# EAGLE board stm32f103XX (EAGLE 7.2.0)
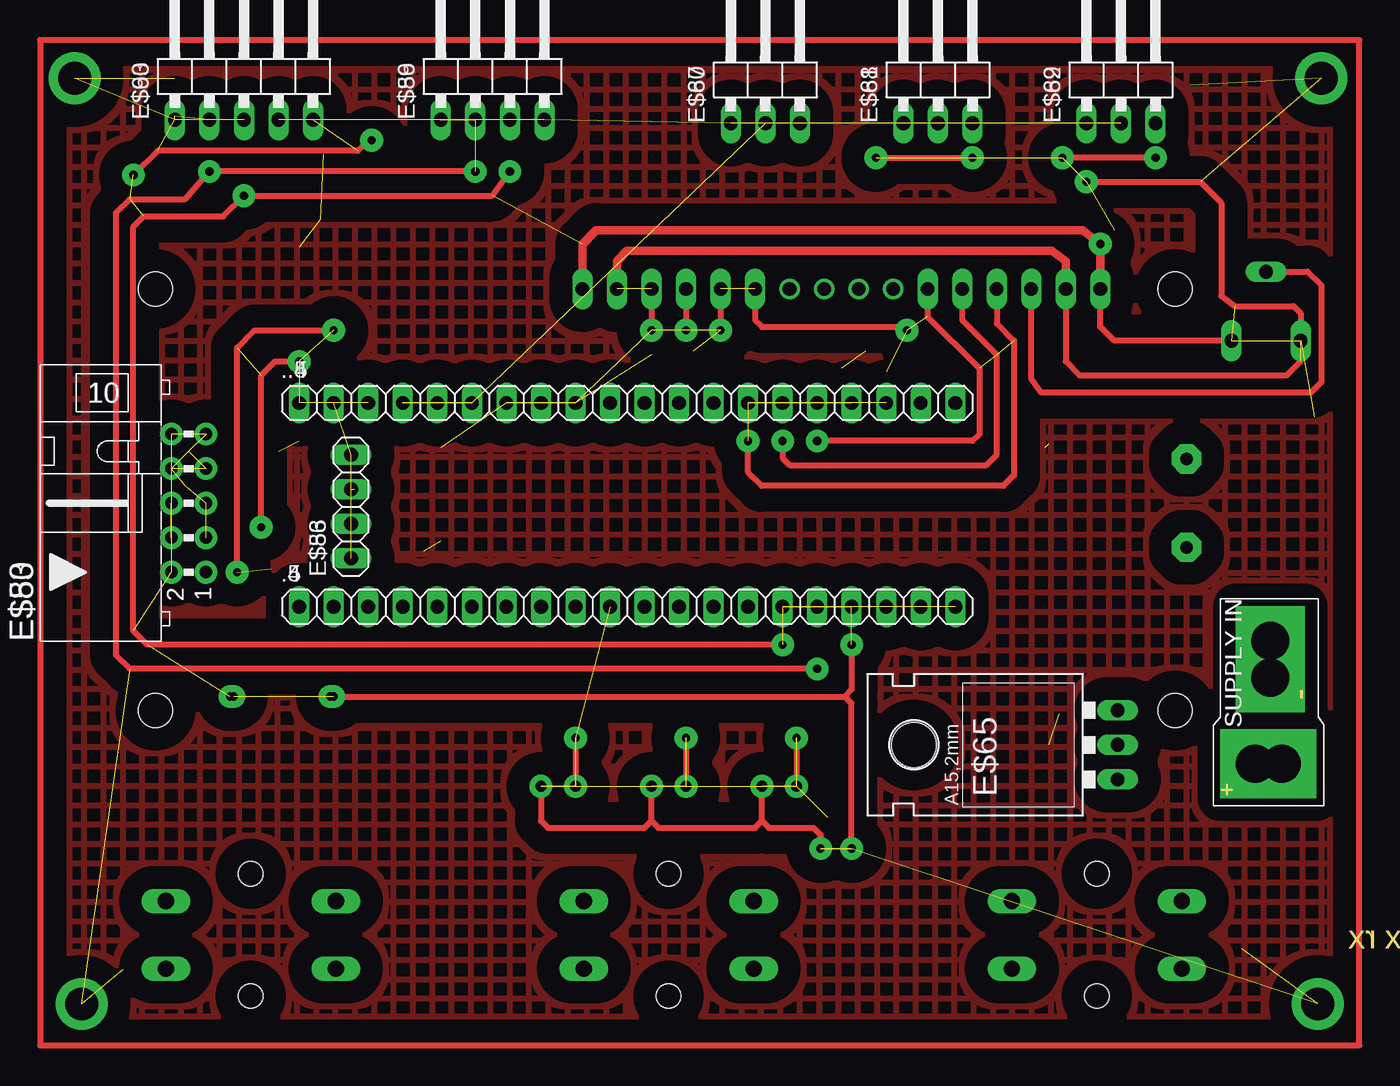
[diagram p0: board, top side]
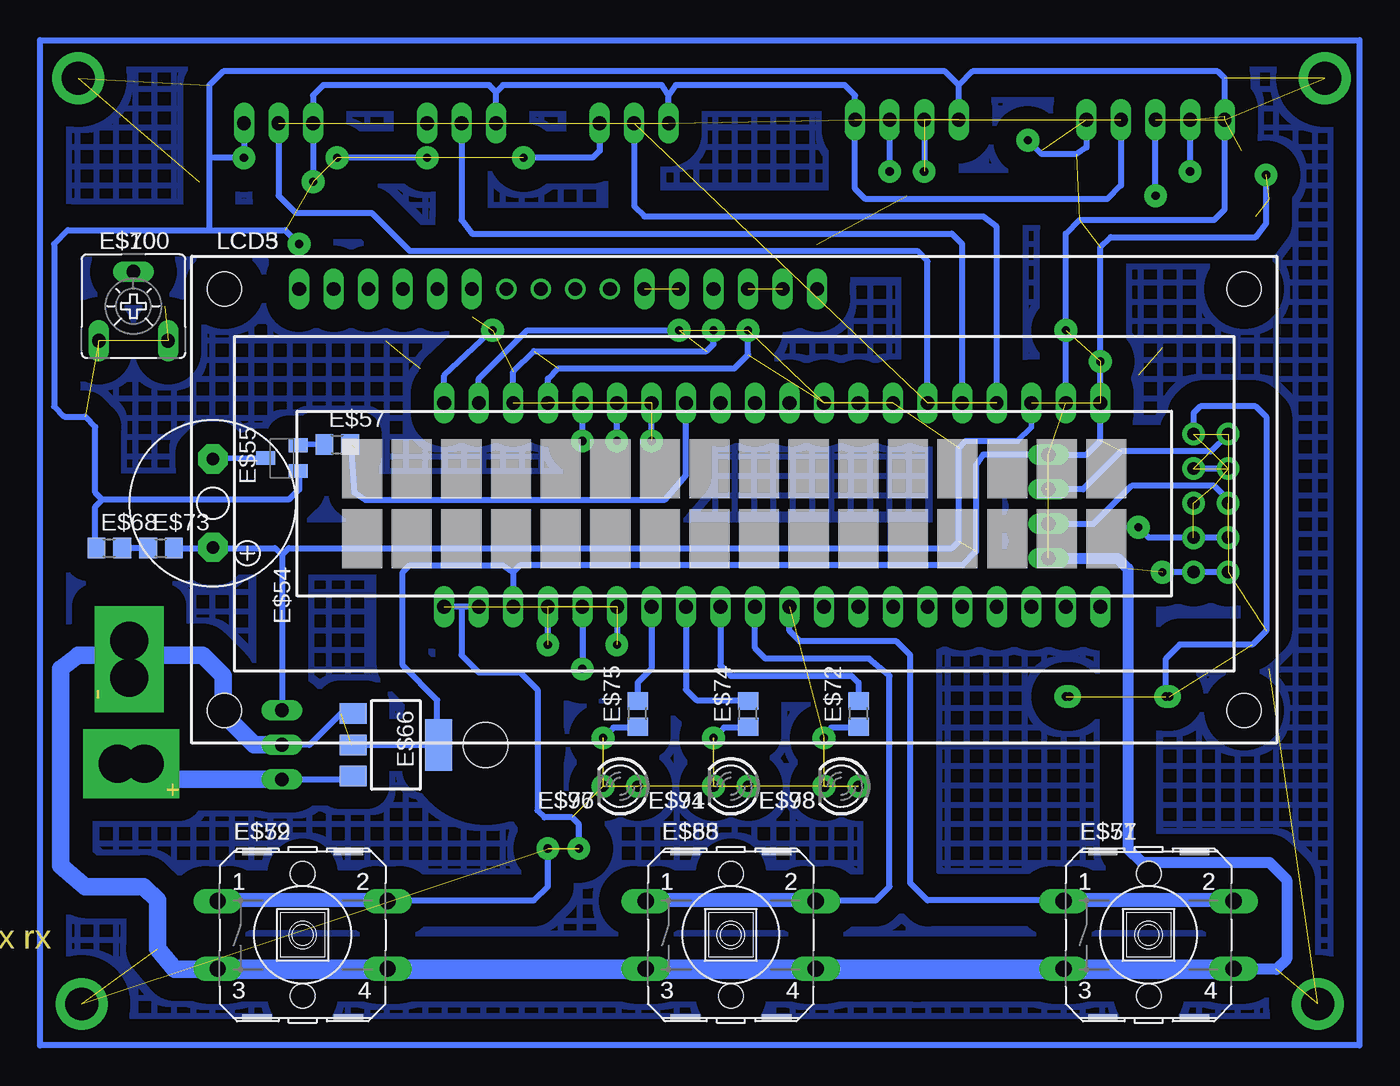
[diagram p1: board, bottom side, seen from below]

No outline drawn. Coordinates in mm, seen from the top.
Copper layers (1*16): Top 0.035mm / dielectric 1.5mm / Bottom 0.035mm
Design rules "default": minimum track width 10mil, minimum drill 24mil, track to track 8mil, track to pad 8mil, pad to pad 8mil, via to via 8mil, smd to smd 8mil, copper to edge 40mil, drill to drill 8mil, minimum pad ring 10mil, minimum via ring 8mil, stop-mask expansion 4mil, vias tented up to drill 0mil, thermal gap 10mil

## Footprints (pad centres in the part's own frame; a part is rotated, then mirrored left to right if it is on the bottom)
1X20 = drill 1.016 long: 1 -24.13,0; 2 -21.59,0; 3 -19.05,0; 4 -16.51,0; 5 -13.97,0; 6 -11.43,0; 7 -8.89,0; 8 -6.35,0; 9 -3.81,0; 10 -1.27,0; 11 1.27,0; 12 3.81,0; 13 6.35,0; 14 8.89,0; 15 11.43,0; 16 13.97,0; 17 16.51,0; 18 19.05,0; 19 21.59,0; 20 24.13,0
B3F-40XX = drill 1.194 long: 1 -6.248,2.489; 2 6.248,2.489; 3 -6.248,-2.489; 4 6.248,-2.489 | hole 1.803: 0,-4.496; 0,4.496
ML10L = drill 0.914 octagon: 1 -5.08,-1.27; 2 -5.08,1.27; 3 -2.54,-1.27; 4 -2.54,1.27; 5 0,-1.27; 6 0,1.27; 7 2.54,-1.27; 8 2.54,1.27; 9 5.08,-1.27; 10 5.08,1.27
F/QMX = drill 0.914 pad 2.159 octagon: + 3.251,0; - -3.251,0
SC59-EBC = smd 1 x 1.4: B 0.95,-1.2; C 0,1.2; E -0.95,-1.2
1X04 = drill 1.016 long: 1 -3.81,0; 2 -1.27,0; 3 1.27,0; 4 3.81,0
R0805 = smd 1.3 x 1.5: 1 -0.95,0; 2 0.95,0
1X04/90 = drill 1.016 long: 1 -3.81,-3.81; 2 -1.27,-3.81; 3 1.27,-3.81; 4 3.81,-3.81
1X03/90 = drill 1.016 long: 1 -2.54,-3.81; 2 0,-3.81; 3 2.54,-3.81
1X05/90 = drill 1.016 long: 1 -5.08,-3.81; 2 -2.54,-3.81; 3 0,-3.81; 4 2.54,-3.81; 5 5.08,-3.81
78XXL = drill 1.016 long: GND 0,-3.81; IN -2.54,-3.81; OUT 2.54,-3.81 | hole 3.302: 0,11.176
SOT223 = smd 1.5 x 2: 1 -2.3,-3.15; 2 0,-3.15; 3 2.3,-3.15 | smd 3.8 x 2: 4 0,3.15
SUP = drill 2.8 pad 5.08 square: + -3.658,-1.473; +1 -3.658,-3.454; - 2.642,-2.591; -1 5.359,-2.591
CA6V = drill 1.016 long: A -2.54,-2.54; E 2.54,-2.54; S 0,2.54
LED3MM = drill 0.813 octagon: A -1.27,0; K 1.27,0
TUXGR_16X2_R2 = drill 1 pad 1.27 long: 1 -32.01,15.498; 2 -29.47,15.498; 3 -26.93,15.498; 4 -24.39,15.498; 5 -21.85,15.498; 6 -19.31,15.498; 12 -4.07,15.498; 13 -1.53,15.498; 14 1.01,15.498; 15 3.55,15.498; 16 6.09,15.498 | drill 1 pad 0.254: 7 -16.76,15.5; 8 -14.22,15.5; 9 -11.68,15.5; 10 -9.14,15.5; 17 -11.69,15.498 | drill 1 pad 1.422 long: 11 -6.61,15.498 | hole 2.5: -37.5,-15.5; 37.5,-15.5; -37.5,15.5; 37.5,15.5

## Placement (x,y rotation side)
.4  [1X20]  129.54,108.46 0 top
.5  [1X20]  129.54,108.46 0 top
..4  [1X20]  129.54,123.44 0 top
..5  [1X20]  129.54,123.44 0 top
E$51  [B3F-40XX]  101.85,84.33 0 bottom
E$52  [B3F-40XX]  164.08,84.33 0 bottom
E$53  [ML10L]  97.28,116.08 90 top
E$54  [F/QMX]  170.69,116.08 270 bottom
E$55  [SC59-EBC]  165.61,119.38 90 bottom
E$56  [1X04]  109.22,115.82 90 top
E$57  [R0805]  161.54,120.4 0 bottom
E$58  [B3F-40XX]  132.59,84.33 0 bottom
E$59  [1X04/90]  119.63,148.08 0 top
E$60  [1X03/90]  139.7,147.83 0 top
E$61  [1X03/90]  152.4,147.83 0 top
E$62  [1X03/90]  165.86,147.83 0 top
E$63  [1X05/90]  101.35,148.08 0 top
E$65  [78XXL]  161.8,98.3 90 top
E$66  [SOT223]  157.23,98.3 270 bottom
E$68  [R0805]  178.31,112.78 0 bottom
E$69  [SUP]  174.24,100.58 90 top
E$70  [CA6V]  176.53,130.56 0 bottom
E$71  [LED3MM]  132.59,95.25 180 bottom
E$72  [R0805]  123.19,100.58 90 bottom
E$73  [R0805]  174.5,112.78 0 bottom
E$74  [R0805]  131.32,100.58 90 bottom
E$75  [R0805]  139.45,100.58 90 bottom
E$76  [LED3MM]  140.72,95.25 180 bottom
E$77  [B3F-40XX]  101.85,84.33 0 bottom
E$78  [LED3MM]  124.46,95.25 180 bottom
E$79  [B3F-40XX]  164.08,84.33 0 bottom
E$80  [ML10L]  97.28,116.08 90 top
E$83  [1X04]  109.22,115.82 90 top
E$85  [B3F-40XX]  132.59,84.33 0 bottom
E$86  [1X04/90]  119.63,148.08 0 top
E$87  [1X03/90]  139.7,147.83 0 top
E$88  [1X03/90]  152.4,147.83 0 top
E$89  [1X03/90]  165.86,147.83 0 top
E$90  [1X05/90]  101.35,148.08 0 top
E$94  [LED3MM]  132.59,95.25 180 bottom
E$97  [LED3MM]  140.72,95.25 180 bottom
E$98  [LED3MM]  124.46,95.25 180 bottom
E$100  [CA6V]  176.53,130.56 0 bottom
E$102  [SUP]  174.24,100.58 90 top
LCD3  [TUXGR_16X2_R2]  132.33,116.33 0 bottom
LCD5  [TUXGR_16X2_R2]  132.33,116.33 0 bottom

## Library data of the parts
.4 .5 ..4 ..5 E$56 E$59-E$63 E$83 E$86-E$90 = pinhead
E$51 E$52 E$58 E$77 E$79 E$85 = switch-omron
E$53 E$80 = con-ml
E$54 = buzzer
E$55 = transistor
E$57 E$68 E$72-E$75 = resistor
E$65 E$66 = v-reg
E$69 E$102 = SUP
E$70 E$100 = pot
E$71 E$76 E$78 E$94 E$97 E$98 = led
LCD3 LCD5 = display-lcd

## Nets
S$4: ..5.1 ..5.2 ..5.3 E$83.1 E$83.2 E$83.3 E$83.4
S$6: E$80.3 E$80.5
S$7: .4.10
S$43: .4.15 .4.16 .4.17 .4.18 .4.19 .4.20 ..4.1 ..4.2 ..4.3 ..4.7 ..4.8 ..4.9 ..4.14 ..4.15 ..4.16 ..4.17 ..4.18 E$53.2 E$53.3 E$53.4 E$53.5 E$53.6 E$53.9 E$53.10 E$56.1 E$56.2 E$56.3 E$56.4 E$59.1 E$59.2 E$59.3 E$63.1 E$63.2 E$63.3 E$63.5 E$65.GND E$65.OUT E$70.A E$70.E E$71.A E$76.A E$78.A
S$90: .4.11
S$124: .4.13
S$125: ..4.13
S$126: ..4.10
S$127: E$62.3
S$131: .4.12
S$133: .4.9
S$139: ..4.20
S$140: ..4.19
S$141: E$70.S
S$142: .5.11
S$146: ..4.4 ..4.5 ..4.6 E$60.2 E$61.2 E$62.2
S$147: E$53.7 E$53.8
S$148: ..5.10
S$149: .5.12
S$150: .5.9
S$152: E$60.3
S$154: ..5.4 ..5.5 ..5.6 E$87.2 E$88.2 E$89.2
S$156: E$87.3
S$157: E$78.K
S$158: E$71.K
S$159: E$76.K
S$160: E$65.IN
S$161: E$59.4 E$60.1 E$61.1 E$62.1 E$63.4
S$162: E$98.K
S$164: E$94.K
S$165: E$97.K
S$166: ..5.20
S$167: ..5.19
S$168: E$100.S
S$170: .5.13
S$171: ..5.13
S$174: E$86.4 E$87.1 E$88.1 E$89.1 E$90.4
S$175: E$89.3
S$179: .5.10 .5.15 .5.16 .5.17 .5.18 .5.19 .5.20 ..5.7 ..5.8 ..5.9 ..5.14 ..5.15 ..5.16 ..5.17 ..5.18 E$80.2 E$80.4 E$80.6 E$80.9 E$80.10 E$86.1 E$86.2 E$86.3 E$90.1 E$90.2 E$90.3 E$90.5 E$94.A E$97.A E$98.A E$100.A E$100.E

## Tracks (layer width: path | path; a pad name or v marks a point on that pad's centre or on a via)
S$2
  pour Top (isolate 1.676, hatched): 183.39,76.2 86.36,76.2 86.36,150.11 183.39,150.11
S$3
  pour Bottom (isolate 1.676, hatched): 86.36,76.2 183.39,76.2 183.39,150.11 86.36,150.11
S$4  (via drill 0.6 pad 1.68)  (8 unrouted)
  Top 0.457: v107.95,128.78 102.11,128.78 100.84,127.51 v100.84,111 | v102.62,114.3 102.62,125.48 103.63,126.49 v105.41,126.49
S$5  (via drill 0.6 pad 1.68)
  other vias: 98.55,111
S$6  (via drill 0.6 pad 1.68)  (1 unrouted)
  other vias: 98.55,116.08 98.55,116.08 98.55,113.54
S$7
  Bottom 0.457: .4.10 128.27,106.68 127.51,105.92 120.4,105.92 119.38,104.9 119.38,88.14 118.11,86.87 108.2,86.87
  Bottom 1.016: 95.76,86.87 108.2,86.87
S$43  (via drill 0.6 pad 1.68, 2.41 pad 3.81)  (54 unrouted)
  Bottom 0.406: 111.51,120.65 110.49,121.67 ..4.3
  Bottom 0.457: ..4.18 148.59,125.73 147.07,127.25 134.37,127.25 133.86,127.76 v133.86,128.78 | ..4.17 146.05,125.22 145.29,125.98 132.33,125.98 131.32,127 v131.32,128.78 | v140.97,120.65 ..4.15 | v143.51,120.65 ..4.16 | 157.99,86.87 147.07,86.87 146.05,87.88 v146.05,90.68 | .4.19 152.4,108.46 | 152.4,108.46 .4.20 | 111.51,120.65 115.32,120.65 115.82,120.14 115.82,113.28 116.33,112.78 165.1,112.78 165.61,112.27 | 160.53,98.3 154.18,98.3 | 154.18,98.3 153.92,98.3 | 154.18,98.3 154.18,101.6 156.72,104.14 156.72,111 156.21,111.51 149.35,111.51 148.59,111 | v93.22,140.21 93.22,136.65 93.98,135.64 104.65,135.64 105.41,134.87 ..4.1 105.41,120.65 106.43,119.63 E$56.4 114.05,119.63 114.55,118.87 114.55,112.52 115.57,111.51 148.08,111.51 148.59,111 | 148.59,111 .4.18 | 152.4,108.46 152.4,104.9 151.13,103.63 148.08,103.63 146.81,102.36 146.81,93.47 146.3,92.96 144.27,92.96 143.76,92.46 v143.76,90.68 | ..4.2 107.95,135.89 106.93,136.91 97.03,136.91 96.27,137.67 96.27,144.53 | E$56.2 105.92,114.55 103.12,117.35 97.03,117.35 96.01,116.33 E$53.6 | E$63.5 106.43,142.24 107.19,141.73 109.73,141.73 v110.74,142.75 | E$63.1 96.27,147.32 96.77,147.83 114.81,147.83 115.82,146.81 | E$59.1 115.82,146.81 | 115.82,146.81 116.84,147.83 169.93,147.83 170.94,146.81 170.94,141.48 | v154.94,141.48 v161.54,141.48 | .4.15 v140.97,105.66 | .4.16 v143.51,103.89 | E$59.3 v120.9,140.46 | E$59.2 v118.36,140.46 | v146.05,105.66 .4.17 | v101.35,138.68 E$63.3 | v98.81,140.46 E$63.2 | 161.29,100.58 163.58,98.3 E$65.GND | 170.94,136.14 181.36,136.14 182.37,135.13 182.37,123.19 181.61,122.43 180.09,122.43 179.32,121.67 179.32,116.84 178.82,116.33
  Bottom 0.457: 170.94,136.14 165.35,136.14 v164.34,135.13 | 170.94,141.48 170.94,136.14 | 164.34,117.86 164.34,117.09 165.1,116.33 178.82,116.33 | v168.4,141.48 170.94,141.48 | 119.13,82.04 118.87,81.79 | E$53.2 v98.55,111 v100.84,111 | E$53.4 E$53.3 101.85,113.54 v102.62,114.3 | 109.47,117.09 106.68,117.09 103.89,119.89 97.28,119.89 E$53.10 | 170.69,112.78 166.12,112.78 165.61,112.27 | 179.32,112.78 179.32,115.82 178.82,116.33 | E$53.9 98.55,122.68 98.04,123.19 93.98,123.19 93.22,122.43 93.22,106.68 94.23,105.66 99.57,105.66 100.58,104.65 v100.58,101.85 | 165.61,112.27 E$65.OUT | v138.43,120.65 ..4.14
  Bottom 0.813: E$56.1 104.14,112.01 103.38,111.25 103.38,90.68 102.36,89.66 92.96,89.66 91.69,88.39 91.69,82.55 92.46,81.79 95.76,81.79
  Bottom 1.016: 157.99,86.87 170.18,86.87
  Bottom 1.27: E$65.GND 167.64,98.3 169.93,100.58 169.93,103.38 171.45,104.9 180.59,104.9 181.86,103.89 181.86,89.41 180.09,87.88 175.77,87.88 174.75,86.87 174.75,83.31 173.48,81.79 170.43,81.79
  Bottom 1.422: 95.76,81.79 118.87,81.79 170.43,81.79
  other vias: 107.95,101.85 147.83,141.48 163.32,139.7 123.19,95.25 125.73,95.25 133.86,95.25 139.45,95.25 141.99,95.25 96.01,111 105.41,126.49 107.95,128.78 96.01,113.54 98.55,113.54 98.55,116.08 96.01,116.08 96.01,116.08 96.01,118.62 98.55,116.08 98.55,118.62 98.55,121.16 96.01,121.16 125.73,95.25 125.73,98.81 133.86,98.81 141.99,98.81 136.4,128.78 150.11,128.78 89.41,79.25 88.9,147.32 180.59,147.32 180.34,79.25
S$75
  Bottom 0.457: 138.43,108.2 138.43,103.89 139.45,102.87 139.45,101.6 139.19,101.35
S$124
  Bottom 0.457: .4.13 135.89,102.36 135.13,101.6 131.32,101.6
S$125  (1 unrouted)
  Bottom 0.457: 160.78,119.89 160.27,120.14 | 160.53,120.4 160.27,116.84 159.51,116.33 137.41,116.33 135.89,118.11 ..4.13
S$127
  Bottom 0.457: E$62.3 168.4,141.48
S$128
  Bottom 0.457: 173.48,112.78 170.69,112.78
S$130
  Bottom 0.457: 86.36,76.2 183.39,76.2 183.39,150.11 86.36,150.11 86.36,76.2
S$131
  Bottom 0.457: .4.12 133.35,104.14 132.59,103.38 123.7,103.38 123.19,102.87 123.19,101.6
S$137
  Bottom 0.457: 126.49,86.87 121.92,86.87 120.9,87.88 120.9,103.38 122.43,104.65 130.05,104.65 130.81,105.41 130.81,108.71
  Bottom 1.016: 126.24,86.87 126.49,86.87 138.94,86.87
S$139
  Bottom 0.457: ..4.20 153.67,125.48 149.86,129.03
S$140
  Bottom 0.457: ..4.19 151.13,125.22 147.57,128.78 136.4,128.78
S$143
  Bottom 0.406: 166.62,119.38 170.69,119.38
S$144
  Bottom 0.406: 164.34,120.4 162.56,120.4
S$146  (2 unrouted)
  Bottom 0.457: E$60.2 139.7,137.92 138.94,137.16 114.05,137.16 113.03,136.4 ..4.4 | E$61.2 152.4,136.91 151.64,135.89 116.33,135.89 115.57,135.13 ..4.5 | E$62.2 165.86,138.68 164.59,137.41 159,137.41 156.21,134.62 118.87,134.62 118.11,133.86 ..4.6
S$147
  Bottom 0.457: E$53.8 E$53.7
S$152
  Bottom 0.457: E$60.3 142.24,141.99 142.75,141.48 147.83,141.48
S$154  (5 unrouted)
S$157  (1 unrouted)
  Bottom 0.457: 123.19,99.57 125.22,99.57 125.73,98.81
S$158  (1 unrouted)
  Bottom 0.457: 131.32,99.57 133.1,99.57 133.86,98.81
S$159  (1 unrouted)
  Bottom 0.457: 139.45,99.57 141.22,99.57 141.99,98.81
S$160
  Bottom 0.457: E$65.IN 160.53,95.76
  Bottom 1.27: E$65.IN 177.8,95.76
S$161
  Bottom 0.457: E$63.4 103.89,139.45 104.9,138.43 122.68,138.43 123.44,139.19 E$59.4 123.44,146.05 124.21,146.81 136.65,146.81 137.16,146.05 | E$60.1 137.16,146.05 | 137.16,146.05 137.67,146.81 149.35,146.81 149.86,146.3 | E$61.1 149.86,146.3 | 149.86,146.3 150.37,146.81 162.56,146.81 163.32,146.05 E$62.1 163.32,139.7
S$163
  Bottom 0.457: 175.51,112.78 177.55,112.78
S$168
  Top 0.457: E$100.S 179.58,133.1 180.59,132.08 180.59,124.97 179.83,124.21 160.02,124.21 159.26,125.22 159.26,131.83
S$174  (4 unrouted)
S$179  (via drill 0.6 pad 1.68, 2.41 pad 3.81)  (53 unrouted)
  Top 0.457: 138.94,131.83 138.94,129.54 139.45,129.03 149.86,129.03 v150.11,128.78 | 179.07,126.49 178.05,125.48 162.81,125.48 161.8,126.49 161.8,131.83 | 156.72,131.83 156.72,129.29 157.99,128.02 157.99,118.11 157.23,117.35 139.45,117.35 138.43,118.36 v138.43,120.65 | 151.64,131.83 151.64,129.79 155.45,125.98 155.45,121.16 154.94,120.65 v143.51,120.65 | v147.83,141.48 v154.94,141.48 | v140.97,105.66 94.23,105.66 93.22,106.68 93.22,136.4 93.98,137.16 99.82,137.16 v101.35,138.68 119.63,138.68 v120.9,140.46 | v143.51,103.89 92.96,103.89 91.95,104.9 91.95,137.41 92.96,138.43 97.03,138.43 v98.81,140.46 v118.36,140.46 | v146.05,90.68 146.05,101.35 145.54,101.85 | v110.74,142.75 110.49,142.75 109.73,141.99 95,141.99 v93.22,140.21 | v168.4,141.48 v161.54,141.48 | v107.7,101.85 145.54,101.85 | v146.05,105.66 146.05,102.36 145.54,101.85 | E$98.A 123.19,92.71 123.7,92.2 130.81,92.2 131.32,92.71 | 131.32,92.71 E$94.A | 131.32,92.71 131.83,92.2 138.94,92.2 139.45,92.71 | 139.45,92.71 E$97.A | v141.99,98.81 v141.99,95.25 | v133.86,98.81 v133.86,95.25 | v125.73,98.81 v125.73,95.25 | 139.45,92.71 139.95,92.2 143.26,92.2 143.76,91.69 v143.76,90.68 | v140.97,120.65 140.97,119.38 141.48,118.87 155.96,118.87 156.72,119.63 156.72,127 154.18,129.54 154.18,131.83 | 131.32,131.83 v131.32,128.78 | 133.86,131.83 v133.86,128.78 | 136.4,131.83 v136.4,128.78 | E$100.E 165.35,128.02 164.34,129.03 164.34,131.83 | v163.32,139.7 171.7,139.7 173.23,138.18 173.23,131.32 174.24,130.56 178.56,130.56 179.07,130.05 E$100.A
  Top 0.61: 126.24,131.83 126.24,135.13 127.25,136.14 163.07,136.14 v164.34,135.13 164.34,131.83 | 128.78,131.83 128.78,133.86 129.54,134.62 160.78,134.62 161.8,133.86 161.8,131.83
  other vias: 123.19,95.25 131.32,95.25 139.45,95.25 96.01,111 96.01,113.54 96.01,116.08 96.01,116.08 96.01,118.62 98.55,118.62 98.55,121.16 96.01,121.16 89.41,79.25 88.9,147.32 180.59,147.32 180.34,79.25 100.33,101.85
S$180
  Top 0.457: 86.36,76.2 183.39,76.2 183.39,150.11 86.36,150.11 86.36,76.2

## Text on the board
Dimension: rx | tx